# Altium PCB stm32.PcbDoc
Units mil, origin at the board's own origin, x right, y up, seen from the top; angles counter-clockwise.
Board outline 5275 x 3910 mil, 2 copper layers (Top Layer, Bottom Layer); 36 components, 59 nets, 279 pads, 15 vias.
Unrouted connection lines stored in the file: 6.
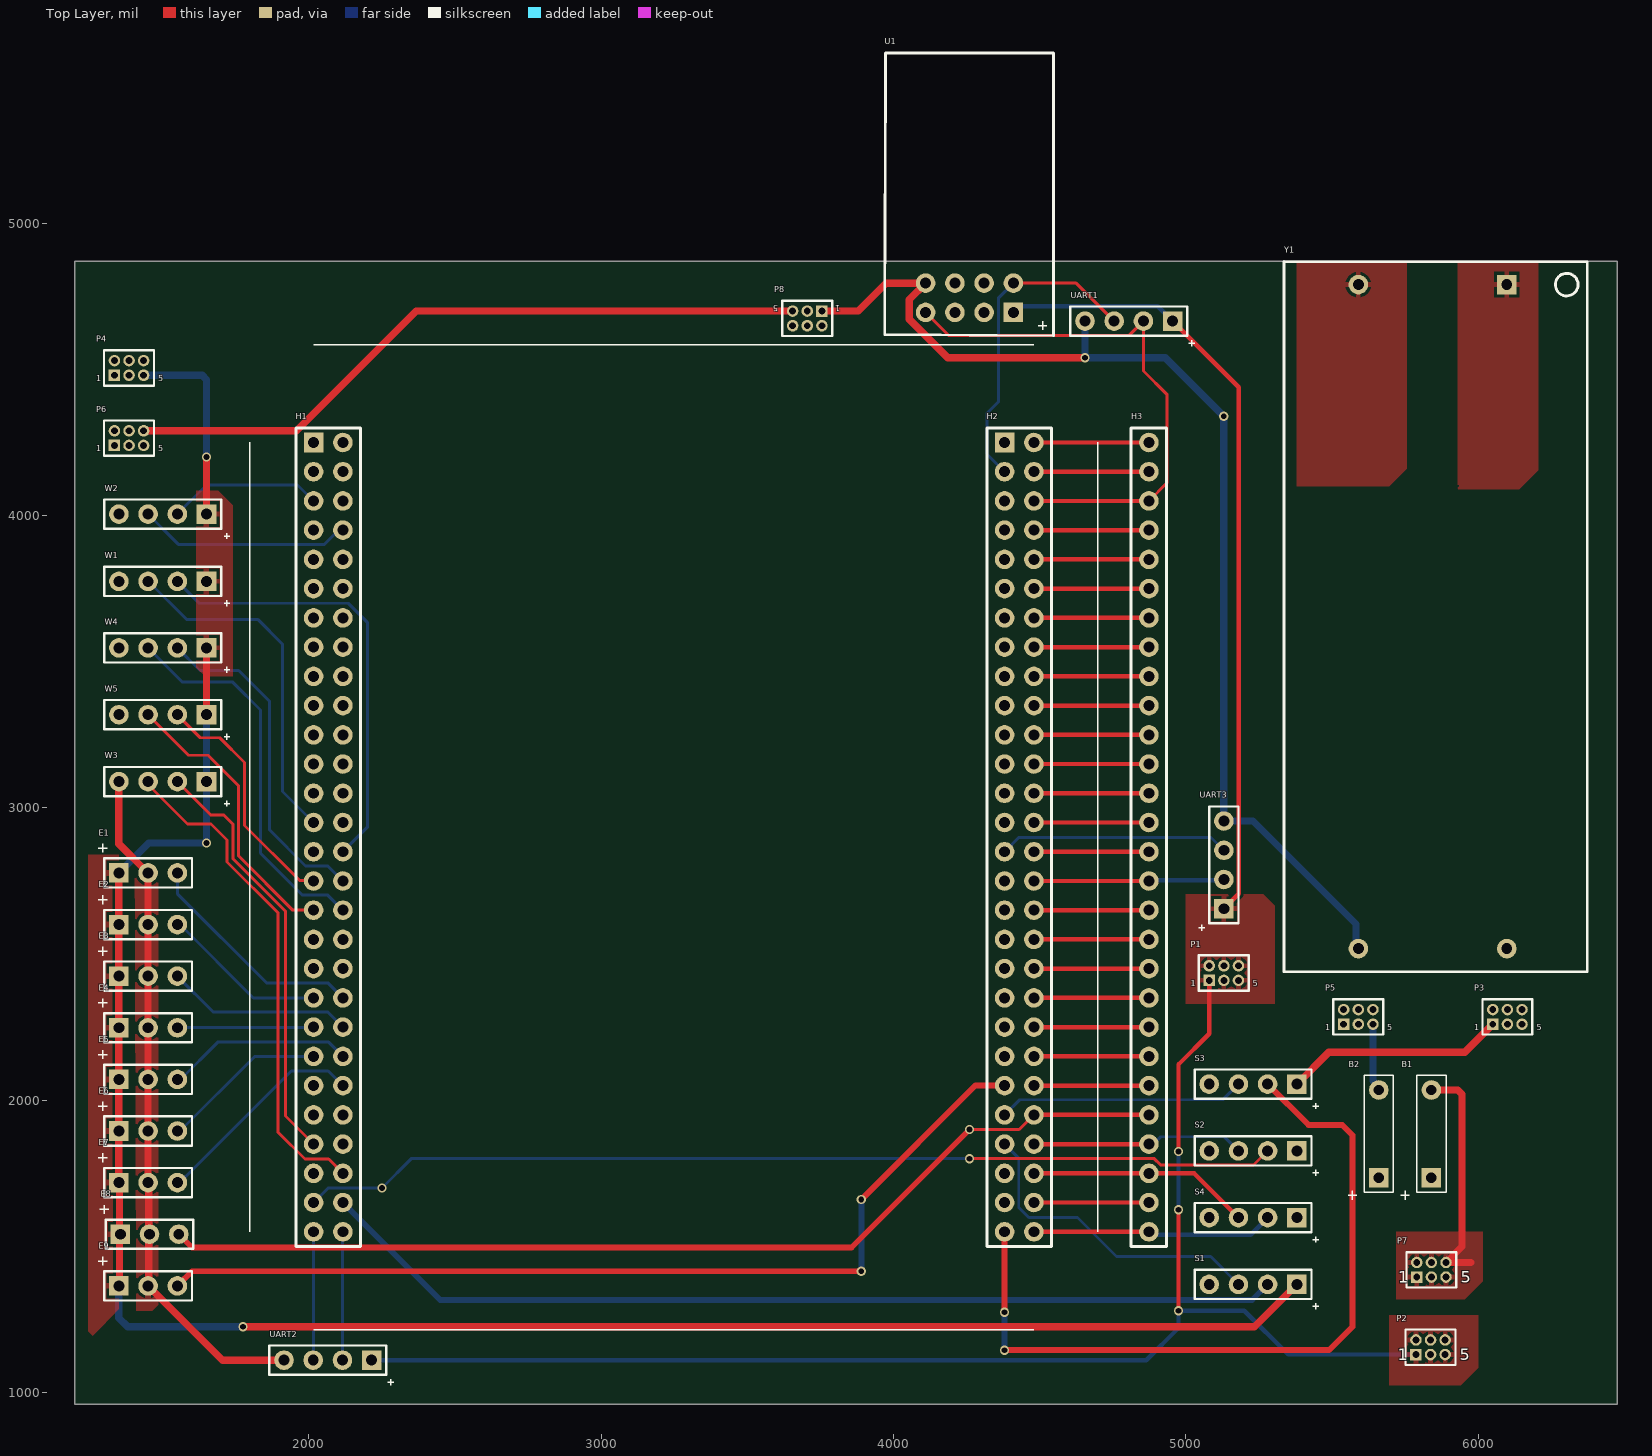
[diagram p0: Top Layer view]
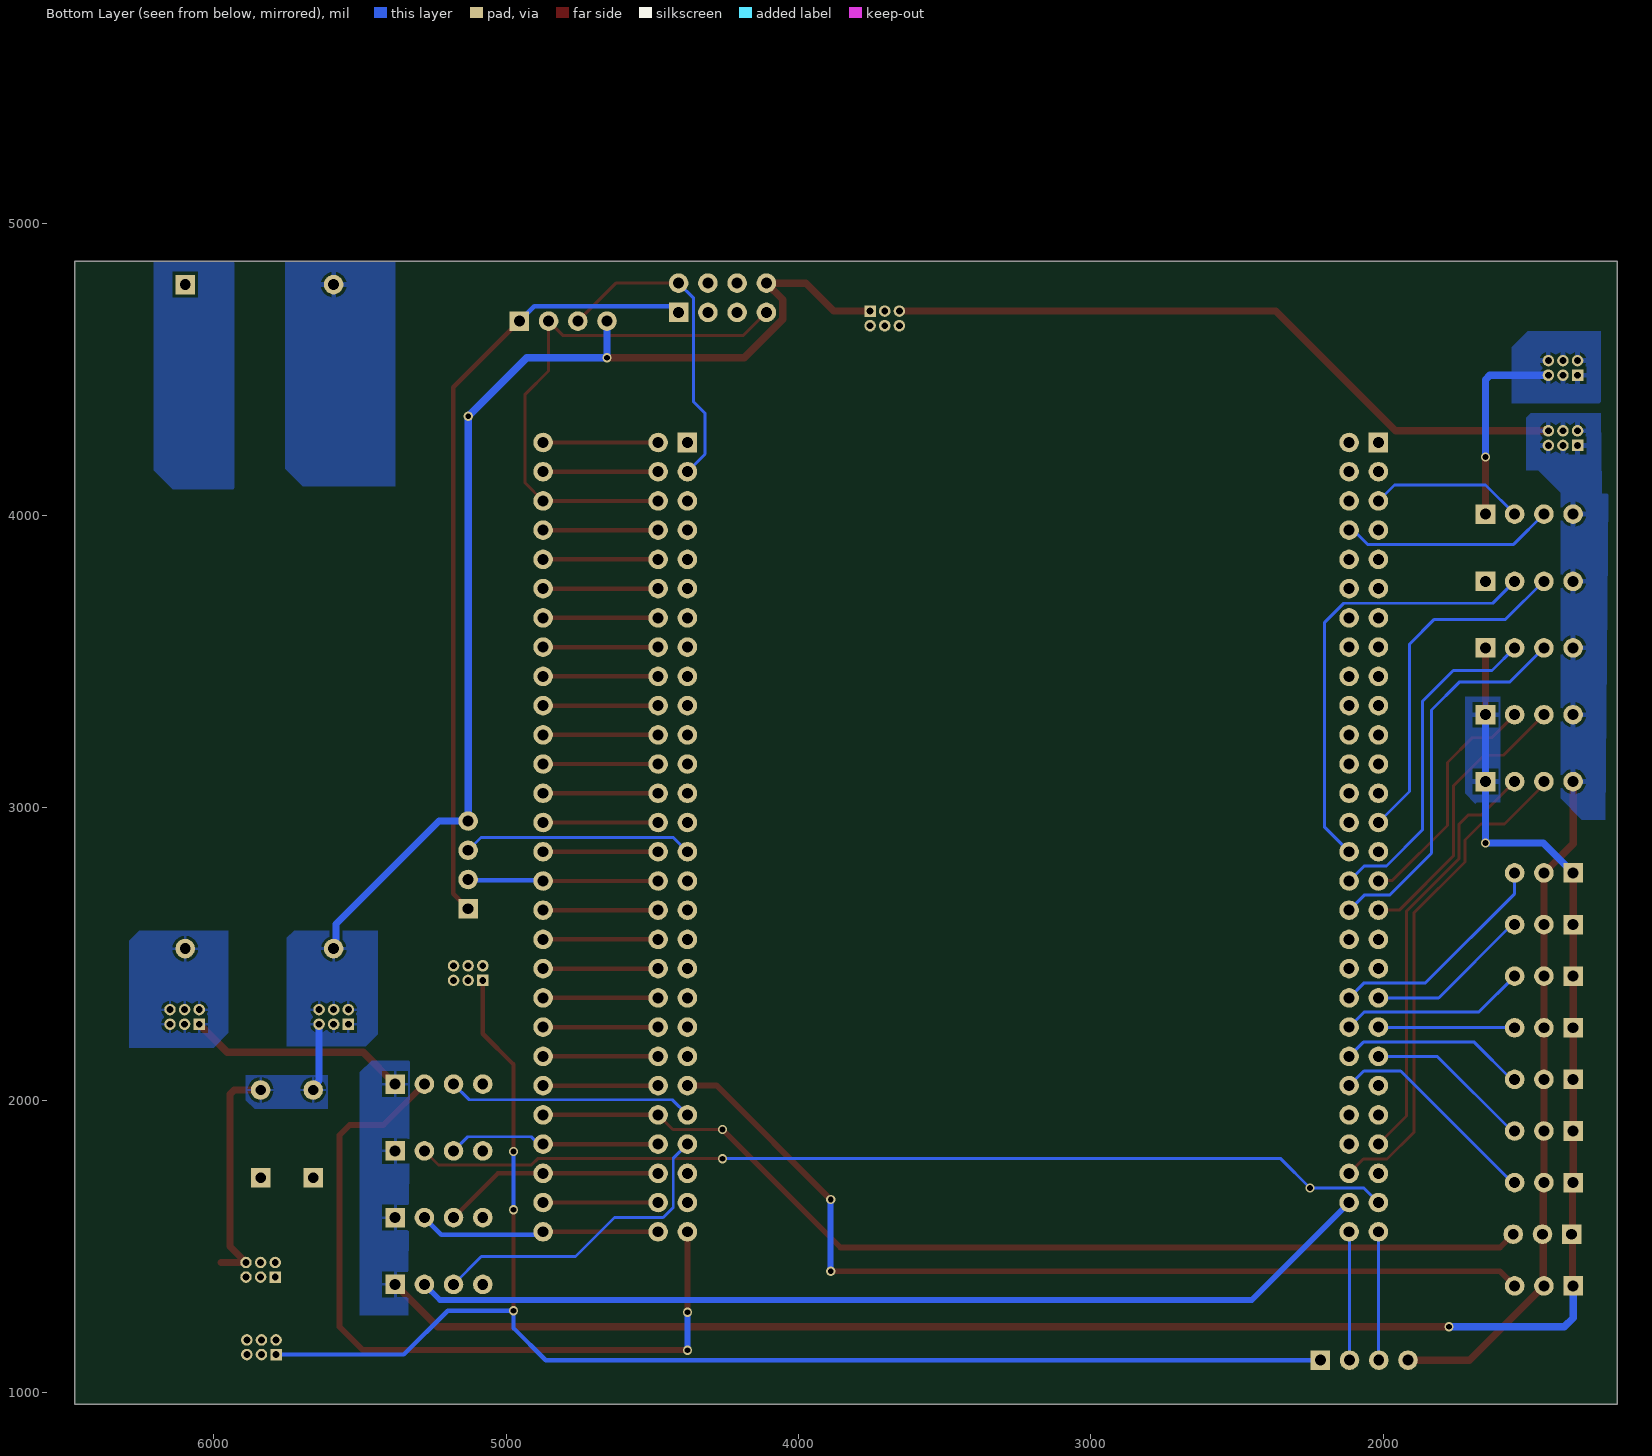
[diagram p1: Bottom Layer view, seen from below]

## Layer stack, top to bottom
Top Solder: solder mask 0.4, Solder Resist, Dk 3.5
Top Layer: signal copper 1.4
Dielectric 1: dielectric 12.6, FR-4, Dk 4.8
Bottom Layer: signal copper 1.4
Bottom Solder: solder mask 0.4, Solder Resist, Dk 3.5

## Board outline
1200,960 6475,960 6475,4870 1200,4870

## Design rules (kind name [scope] priority, off if disabled: settings)
Clearance [All] p1: gap=10 ignorepadtopadclearanceinfootprint=FALSE except(0: Arc-Hole Track-Hole SMDPad-Hole THPad-Hole Via-Hole Fill-Hole Poly-Hole Region-Hole Text-Hole)
PolygonConnect [All] p1: connectstyle=Relief reliefconductorwidth=18 reliefentries=4 polygonreliefangle="90 Angle" airgapwidth=10
RoutingVias [All] p1: holewidth=28 width=50 viastyle="Through Hole" minholewidth=28 minwidth=50 maxholewidth=28 maxwidth=50
SolderMaskExpansion [All] p1: expansion=4
Width POWER [InNetClass('POWER')] p1: maxlimit=60 minlimit=15 preferedwidth=25
Width [All] p2: maxlimit=30 minlimit=10 preferedwidth=15
30 further rules are at their usual default settings.

## Classes and differential pairs
net class POWER: 3.3V 5V GND

## Components (designator, comment, footprint, x,y, rotation, side; value= is the part's Value field where it differs from the comment)
B1 "BEEP" BEEP 5840,1735 r90 top
B2 "BEEP" BEEP 5660,1735 r90 top
E1 "E18-D80NK" E18 1350,2777.5 r0 top
E2 "E18-D80NK" E18 1350,2600.94 r0 top
E3 "E18-D80NK" E18 1350,2424.38 r0 top
E4 "E18-D80NK" E18 1350,2247.81 r0 top
E5 "E18-D80NK" E18 1350,2071.25 r0 top
E6 "E18-D80NK" E18 1350,1894.69 r0 top
E7 "E18-D80NK" E18 1350,1718.12 r0 top
E8 "E18-D80NK" E18 1355,1541.56 r0 top
E9 "E18-D80NK" E18 1350,1365 r0 top
H1 "STM32_L_正插" Header2*28 2016.22,4250 r0 top locked
H2 "STM32_R_正插" Header2*28 4380,4250 r0 top locked
H3 "STM32_R_R" HEADER1*28 4813.07,4300 r0 top
P1 "MHDR2X3" MHDR2X3 5080,2410 r0 top
P2 "MHDR2X3" MHDR2X3 5787.19,1130 r0 top
P3 "MHDR2X3" MHDR2X3 6050,2260 r0 top
P4 "MHDR2X3" MHDR2X3 1335,4480 r0 top
P5 "MHDR2X3" MHDR2X3 5540,2260 r0 top
P6 "MHDR2X3" MHDR2X3 1335,4240 r0 top
P7 "MHDR2X3" MHDR2X3 5790,1395 r0 top
P8 "MHDR2X3" MHDR2X3 3755,4699.46 r180 top
S1 "STEP" STEP 5380,1370 r180 top
S2 "STEP" STEP 5380,1826.67 r180 top
S3 "STEP" STEP 5380,2055 r180 top
S4 "STEP" STEP 5380,1598.33 r180 top
U1 "ESP8266" ESP8266 4110,4695 r90 top
UART1 "UART" UART 4955,4665 r180 top
UART2 "UART" UART 2215,1110.63 r180 top
UART3 "UART" UART 5130,2655 r90 top
W1 "WAVE" WAVE1*4 1650,3775 r180 top
W2 "WAVE" WAVE1*4 1650,4005 r180 top
W3 "WAVE" WAVE1*4 1650,3090 r180 top
W4 "WAVE" WAVE1*4 1650,3547.5 r180 top
W5 "WAVE" WAVE1*4 1650,3318.75 r180 top
Y1 "YS-07" YS-07 6097.87,4790 r270 top

## Footprints (in the part's own frame and the unit in brackets; to place one, negate y for a bottom-side part, rotate by r counter-clockwise, add the part's x,y. Pads: shape width x height; smd on the part's side, far side on the other; paste and mask are expansions set on the pad)
BEEP [mm]
  rect 1.7x1.7 hole 0.9: 1(0,0)
  round 1.7 hole 0.9: 2(7.62,0)
  silkscreen extent -1.91,-1.27 8.89,2.67
E18 [mm]
  rect 1.7x1.7 hole 0.95: 1(0,0)
  round 1.7 hole 0.95: 2(2.54,0) 3(5.08,0)
  silkscreen extent -1.78,-1.27 6.35,2.54
ESP8266 [mm]
  round 1.7 hole 0.95: 1(0,0) 2(0,-2.54) 3(0,-5.08) 5(2.54,-7.62) 6(2.54,-5.08) 7(2.54,-2.54) 8(2.54,0)
  rect 1.7x1.7 hole 0.95: 4(0,-7.62)
  silkscreen extent -2.03,-11.12 22.54,3.56
HEADER1*28 [mm]
  round 1.7 hole 0.95: 29(1.54,-69.85) 30(1.54,-67.31) 31(1.54,-64.77) 32(1.54,-62.23) 33(1.54,-59.69) 34(1.54,-57.15) 35(1.54,-54.61) 36(1.54,-52.07) 37(1.54,-49.53) 38(1.54,-46.99) 39(1.54,-44.45) 40(1.54,-41.91) 41(1.54,-39.37) 42(1.54,-36.83) 43(1.54,-34.29) 44(1.54,-31.75) 45(1.54,-29.21) 46(1.54,-26.67) 47(1.54,-24.13) 48(1.54,-21.59) 49(1.54,-19.05) 50(1.54,-16.51) 51(1.54,-13.97) 52(1.54,-11.43) 53(1.54,-8.89) 54(1.54,-6.35) 55(1.54,-3.81) 56(1.54,-1.27)
  silkscreen extent 0,-71.12 3.08,0
Header2*28 [mm]
  rect 1.7x1.7 hole 0.95: 1(0,0)
  round 1.7 hole 0.95: 2(0,-2.54) 3(0,-5.08) 4(0,-7.62) 5(0,-10.16) 6(0,-12.7) 7(0,-15.24) 8(0,-17.78) 9(0,-20.32) 10(0,-22.86) 11(0,-25.4) 12(0,-27.94) 13(0,-30.48) 14(0,-33.02) 15(0,-35.56) 16(0,-38.1) 17(0,-40.64) 18(0,-43.18) 19(0,-45.72) 20(0,-48.26) 21(0,-50.8) 22(0,-53.34) 23(0,-55.88) 24(0,-58.42) 25(0,-60.96) 26(0,-63.5) 27(0,-66.04) 28(0,-68.58) 29(2.54,-68.58) 30(2.54,-66.04) 31(2.54,-63.5) 32(2.54,-60.96) 33(2.54,-58.42) 34(2.54,-55.88) 35(2.54,-53.34) 36(2.54,-50.8) 37(2.54,-48.26) 38(2.54,-45.72) 39(2.54,-43.18) 40(2.54,-40.64) 41(2.54,-38.1) 42(2.54,-35.56) 43(2.54,-33.02) 44(2.54,-30.48) 45(2.54,-27.94) 46(2.54,-25.4) 47(2.54,-22.86) 48(2.54,-20.32) 49(2.54,-17.78) 50(2.54,-15.24) 51(2.54,-12.7) 52(2.54,-10.16) 53(2.54,-7.62) 54(2.54,-5.08) 55(2.54,-2.54) 56(2.54,0)
  silkscreen extent -1.54,-69.85 4.08,1.27
MHDR2X3 [mm] "Connector; Header; 3x2 Position"
  rect 1x1 hole 0.6: 1(0,0)
  round 1 hole 0.6: 2(0,1.27) 3(1.27,0) 4(1.27,1.27) 5(2.54,0) 6(2.54,1.27)
  silkscreen extent -0.9,-0.9 3.44,2.17
STEP [mm]
  rect 1.7x1.7 hole 0.95: 1(0,0)
  round 1.7 hole 0.95: 2(2.54,0) 3(5.08,0) 4(7.62,0)
  silkscreen extent -1.91,-1.27 8.89,2.16
UART [mm]
  rect 1.7x1.7 hole 0.95: 1(0,0)
  round 1.7 hole 0.95: 2(2.54,0) 3(5.08,0) 4(7.62,0)
  silkscreen extent -1.91,-1.27 8.89,2.16
WAVE1*4 [mm]
  rect 1.7x1.7 hole 0.95: 1(0,0)
  round 1.7 hole 0.95: 2(2.54,0) 3(5.08,0) 4(7.62,0)
  silkscreen extent -2.03,-1.27 8.89,2.16
YS-07 [mm]
  rect 1.7x1.7 hole 0.95: 1(0,0)
  round 1.7 hole 0.95: 2(0,-12.9) 3(57.7,-12.9) 4(57.7,0)
  silkscreen extent -2,-19.35 59.7,7

## Part data
P1 P2 P3 P4 P5 P6 P7 P8: "Header, 3-Pin, Dual row", LatestRevisionDate=17-Jul-2002, LatestRevisionNote="Re-released for DXP Platform.", Publisher="Altium Limited"

## Via types
v1: diameter 31.5, hole 19.68, Top Layer to Bottom Layer, 15 vias

## Nets (pads, with @x,y where several pads share a name; then routed paths per layer and width w, separated by ;. In a path a pad name is that pad's centre, name@x,y a point inside that pad or via, vN(x,y) a via of type N, cw(c..) or ccw(c..) an arc to the next point about the centre after c; other vN are vias at no path point)
3.3V: P1.1 P1.2 P1.3 P1.4 P1.5 P1.6 P2.1 P2.2 P2.3 P2.4 P2.5 P2.6 U1.4 UART1.1 UART2.1 UART3.1 | length 7612.3
  Top Layer w15: UART1.1 5180.96,4439.04 5180.96,2705.96 UART3.1 ; v1(4975,1280) v1(4975,1625) ; v1(4975,1825) 4975,2122.5 5080,2227.5 P1.1
  Bottom Layer w15: UART2.1 4865,1110.63 4975,1220.63 v1(4975,1280) 5200,1280 5350,1130 P2.1 ; U1.4 4430.96,4715.96 4904.04,4715.96 UART1.1 ; v1(4975,1625) v1(4975,1825)
5V: E1.1 E2.1 E3.1 E4.1 E5.1 E6.1 E7.1 E8.1 E9.1 P3.1 P3.2 P3.3 P3.4 P3.5 P3.6 P4.1 P4.2 P4.3 P4.4 P4.5 P4.6 S1.1 S2.1 S3.1 S4.1 W1.1 W2.1 W3.1 W4.1 W5.1 Y1.4 | length 8075.2
  Top Layer w25: E9.1 1352.5,1367.5 1352.5,1539.06 E8.1 1352.5,1544.06 1352.5,1715.62 E7.1 E6.1 E5.1 E4.1 E3.1 E2.1 E1.1 ; W5.1 W4.1 ; W2.1 v1(1650,4200) ; v1(1775,1225) 5235,1225 S1.1 ; S3.1 5489.39,2164.39 5954.39,2164.39 P3.1
  Bottom Layer w25: E9.1 1350,1255 1380,1225 v1(1775,1225) ; E1.1 1452.5,2880 v1(1650,2880) W3.1 W5.1 ; P4.5 1635,4480 1650,4465 v1(1650,4200)
GND: B1.2 B2.2 E1.2 E2.2 E3.2 E4.2 E5.2 E6.2 E7.2 E8.2 E9.2 P5.1 P5.2 P5.3 P5.4 P5.5 P5.6 P6.1 P6.2 P6.3 P6.4 P6.5 P6.6 P7.1 P7.2 P7.3 P7.4 P7.5 P7.6 P8.1 P8.2 P8.3 P8.4 P8.5 P8.6 U1.8 UART1.4 UART2.4 UART3.4 W1.4 W2.4 W3.4 W4.4 W5.4 Y1.3 | length 9693.6
  Top Layer w25: W3.4 1350,2877.5 E1.2 E2.2 E3.2 E4.2 E5.2 E6.2 E7.2 ; P6.6 1957.47,4290 2366.93,4699.46 P8.5 ; E9.2 1704.37,1110.63 UART2.4 ; E9.2@1452.5,1367.5 E8.2@1452.5,1539.06 ; E8.2@1452.5,1544.06 E7.2@1452.5,1715.62 ; P8.1 3879.06,4699.46 3974.6,4795 U1.8 4054.04,4739.04 4054.04,4671.82 4185.85,4540 v1(4655,4540) ; B1.2 5930.05,2035 5944.69,2020.36 5944.69,1499.69 P7.6 5975,1445
  Bottom Layer w25: UART1.4 v1(4655,4540) 4930,4540 v1(5130,4340) UART3.4 5230,2955 5581.98,2603.02 5581.98,2526.37 Y1.3 ; P5.5 5640,2066.35 5660,2046.35 B2.2
IN+: Y1.1
IN-: Y1.2
PA0: H1.30 S1.2 | length 3324.1
  Bottom Layer w20: H1.30 2449.69,1316.54 5226.54,1316.54 S1.2
PA1: H1.27 S2.2 | length 3355
  Top Layer w10: v1(4260,1800) 4892.24,1800 4914.04,1778.2 5231.54,1778.2 S2.2
  Bottom Layer w10: H1.27 2066.22,1700 v1(2250,1700) 2350,1800 v1(4260,1800)
PA2: H1.29 UART2.2 | length 441.6
  Top Layer w10: UART2.2 UART2.2@2115.61,1111.24 ; H1.29@2115.61,1549.39 H1.29
  Bottom Layer w10: UART2.2 2115.61,1111.24 2115.61,1549.39 H1.29
PA3: H1.28 UART2.3 | length 441.6
  Top Layer w10: UART2.3 UART2.3@2015.61,1111.24 ; H1.28@2015.61,1549.39 H1.28
  Bottom Layer w10: UART2.3 2015.61,1111.24 2015.61,1549.39 H1.28
PA4: H2.28 S3.2 | length 2645.6
  Top Layer w20: v1(4380,1145) 5490,1145 5570,1225 5570,1880 5535,1915 5420,1915 S3.2 ; v1(4380,1275) H2.28
  Bottom Layer w20: v1(4380,1145) v1(4380,1275)
PA5: H2.29 H3.29 S4.2 | length 828.3
  Top Layer w15: H2.29 H3.29
  Bottom Layer w15: H3.29 4883.7,1540 5221.67,1540 S4.2
PA7: H2.30 H3.30 | length 393.7
  Top Layer w15: H2.30 H3.30
PA9: H2.54 H3.54 U1.1 UART1.2 | length 1864.8
  Top Layer w10: U1.1 4188.46,4616.54 4806.54,4616.54 UART1.2 4855,4495 4935,4415 4935,4111.3 H3.54
  Top Layer w15: H2.54 H3.54
PA10: H2.2 U1.5 UART1.3 | length 1106
  Top Layer w10: U1.5 4625,4795 UART1.3
  Bottom Layer w10: H2.2 4320,4210 4320,4350 4358.46,4388.46 4358.46,4743.46 U1.5
PA11: H2.55 H3.55 | length 393.7
  Top Layer w15: H2.55 H3.55
PA13: H2.56 H3.56 | length 393.7
  Top Layer w15: H2.56 H3.56
PB0: H2.25 S1.3 | length 1097.6
  Bottom Layer w10: H2.25 4428.46,1801.54 4428.46,1633 4463,1598.46 4629.77,1598.46 4763.23,1465 5085,1465 S1.3
PB1: H2.32 H3.32 S2.3 | length 730.5
  Top Layer w15: H2.32 H3.32
  Bottom Layer w10: H3.32 4889.11,1850 4914.24,1875.13 5131.54,1875.13 S2.3
PB2: H2.24 S3.3 | length 843.5
  Bottom Layer w10: H2.24 4431.54,2001.54 5126.54,2001.54 S3.3
PB10: H2.41 H3.41 UART3.2 | length 652.1
  Top Layer w15: H2.41 H3.41
  Bottom Layer w15: H3.41 4876.2,2752.5 5127.5,2752.5 UART3.2
PB11: H2.15 UART3.3 | length 788.1
  Bottom Layer w10: H2.15 4428.46,2898.46 5086.54,2898.46 UART3.3
PB12: H2.42 H3.42 | length 393.7
  Top Layer w15: H2.42 H3.42
PB14: H2.43 H3.43 | length 393.7
  Top Layer w15: H2.43 H3.43
PC1: H1.25 W3.2 | length 1465.3
  Top Layer w10: W3.2 1550,3080 1560,3080 1665,2975 1710,2975 1740,2945 1740,2826.72 1920,2646.72 1920,1946.22 H1.25
PC2: H1.31 W3.3 | length 1710.4
  Top Layer w10: W3.3 1450,3080 1585,2945 1665,2945 1720,2890 1720,2815 1895,2640 1895,1890 1986.54,1798.46 2067.76,1798.46 H1.31
PC5: H2.31 H3.31 S4.3 | length 762.8
  Top Layer w15: H2.31 H3.31 5028.33,1750 S4.3
PC7: H2.52 H3.52 | length 393.7
  Top Layer w15: H2.52 H3.52
PC9: H2.53 H3.53 | length 393.7
  Top Layer w15: H2.53 H3.53
PD0: H1.3 W2.2 | length 530.4
  Bottom Layer w10: W2.2 1650,4105 1961.22,4105 H1.3
PD1: H1.53 W2.3 | length 729.2
  Bottom Layer w10: W2.3 1553.46,3901.54 2053.46,3901.54 2101.93,3950 H1.53
PD8: H2.44 H3.44 | length 393.7
  Top Layer w15: H2.44 H3.44
PD10: H2.45 H3.45 | length 393.7
  Top Layer w15: H2.45 H3.45
PD12: H2.46 H3.46 | length 393.7
  Top Layer w15: H2.46 H3.46
PD14: H2.47 H3.47 | length 393.7
  Top Layer w15: H2.47 H3.47
PE0: H1.14 W1.3 | length 1203.6
  Bottom Layer w10: W1.3@1450,3776.25 1581.25,3645 1825,3645 1910,3560 1910,3056.22 H1.14
PE1: H1.42 W1.2 | length 1528.8
  Bottom Layer w10: W1.2@1550,3776.25 W1.2 1625,3700 2134.76,3700 2200,3634.76 2200,2933.78 H1.42
PE3: H1.41 W4.2 | length 1154.3
  Bottom Layer w10: W4.2 1627.5,3470 1760,3470 1865,3365 1865,2925 1988.46,2801.54 2064.69,2801.54 H1.41
PE4: H1.16 W5.2 | length 826.5
  Top Layer w10: W5.2 1628.75,3240 ; 1630,3240 1695,3240 1780,3155 1780,2940 1967.76,2752.24 2013.98,2752.24 H1.16
PE5: H1.40 W4.3 | length 1325
  Bottom Layer w10: W4.3 1567.5,3430 1740,3430 1835,3335 1835,2845 1978.46,2701.54 2064.69,2701.54 H1.40
PE6: H1.17 W5.3 | length 982.6
  Top Layer w10: W5.3 1588.75,3180 ; 1590,3180 1655,3180 1760,3075 1760,2835 1945,2650 H1.17
PE8: H2.37 H3.37 | length 393.7
  Top Layer w15: H2.37 H3.37
PE12: H2.38 H2.39 H3.38 H3.39 | length 787.4
  Top Layer w15: H2.38 H3.38 ; H2.39 H3.39
PE14: H2.40 H3.40 | length 393.7
  Top Layer w15: H2.40 H3.40
PF1: E1.3 H1.37 | length 784.9
  Bottom Layer w10: E1.3 1550,2706.54 1855,2401.54 2064.69,2401.54 H1.37
PF2: E2.3 H1.20 | length 570.2
  Bottom Layer w10: E2.3 1559.06,2600.94 1810,2350 H1.20
PF3: E3.3 H1.36 | length 638.4
  Bottom Layer w10: E3.3 1672.84,2301.54 2064.69,2301.54 H1.36
PF4: E4.3 H1.21 | length 467.1
  Bottom Layer w10: E4.3 1551.09,2248.91 2015.13,2248.91 H1.21
PF5: E5.3 H1.35 | length 639
  Bottom Layer w10: E5.3 1561.25,2071.25 1688.46,2198.46 2067.76,2198.46 H1.35
PF6: E6.3 H1.22 | length 572
  Bottom Layer w10: E6.3 1559.69,1894.69 1815,2150 H1.22
PF7: E7.3 H1.34 | length 745.1
  Bottom Layer w10: E7.3 1558.12,1718.12 1940,2100 2066.22,2100 H1.34
PF11: E8.3 H2.33 H3.33 | length 3525.2
  Top Layer w10: v1(4260,1900) 4430,1900 H2.33
  Top Layer w15: H2.33 H3.33
  Top Layer w20: E8.3 1600.03,1496.54 3856.54,1496.54 v1(4260,1900)
PF12: E9.3 H2.23 | length 3257.3
  Top Layer w20: E9.3 1600,1415 v1(3890,1415) ; v1(3890,1660) 4280,2050 H2.23
  Bottom Layer w20: v1(3890,1415) v1(3890,1660)
PF13: H2.34 H3.34 | length 393.7
  Top Layer w15: H2.34 H3.34
PF15: H2.35 H3.35 | length 393.7
  Top Layer w15: H2.35 H3.35
PG1: H2.36 H3.36 | length 393.7
  Top Layer w15: H2.36 H3.36
PG2: H2.48 H3.48 | length 393.7
  Top Layer w15: H2.48 H3.48
PG4: H2.49 H3.49 | length 393.7
  Top Layer w15: H2.49 H3.49
PG6: H2.50 H3.50 | length 393.7
  Top Layer w15: H2.50 H3.50
PG8: H2.51 H3.51 | length 393.7
  Top Layer w15: H2.51 H3.51
pads on no net: B1.1 B2.1 H1.1 H1.2 H1.4 H1.5 H1.6 H1.7 H1.8 H1.9 H1.10 H1.11 H1.12 H1.13 H1.15 H1.18 H1.19 H1.23 H1.24 H1.26 H1.32 H1.33 H1.38 H1.39 H1.43 H1.44 H1.45 H1.46 H1.47 H1.48 H1.49 H1.50 H1.51 H1.52 H1.54 H1.55 H1.56 H2.1 H2.3 H2.4 H2.5 H2.6 H2.7 H2.8 H2.9 H2.10 H2.11 H2.12 H2.13 H2.14 H2.16 H2.17 H2.18 H2.19 H2.20 H2.21 H2.22 H2.26 H2.27 S1.4 S2.4 S3.4 S4.4 U1.2 U1.3 U1.6 U1.7

## Polygon pours and split planes (outlines as drawn)
IN- on Bottom Layer (solid, pour order 40): 5929.62,4865 5934.62,4870 6205,4870 6205,4155 6140,4090 5934.24,4090 5929.62,4094.62
IN- on Bottom Layer "3.3V" (solid, pour order 34): 5380,4870 5755,4870 5755,4160 5695,4100 5380,4100
5V on Bottom Layer (solid, pour order 26): 1255,4630 1505,4630 1560,4575 1560,4385 1260,4385 1255,4390
5V on Bottom Layer (solid, pour order 24): 1600,3380 1720,3380 1720,3050 1685,3015 1680,3020 1600,3020
GND on Bottom Layer (solid, pour order 18): 1230,4075 1392.35,4075 1392.35,3032.35 1320,2960 1240,2960
5V on Bottom Layer (solid, pour order 16): 5330,2135 5460,2135 5500,2095 5500,1265 5335,1265
GND on Bottom Layer (solid, pour order 12): 5610,2085 5890,2085 5890,2000 5860,1970 5610,1970
5V on Bottom Layer (solid, pour order 10): 5950,2580 6255,2580 6290,2545 6290,2180 6001.08,2180 5950,2231.08
GND on Bottom Layer (solid, pour order 6): 5440,2580 5725,2580 5750,2555 5750,2185 5480,2185 5440,2225
GND on Bottom Layer (solid, pour order 2): 1255,4350 1495,4350 1510,4335 1510,4155 1470,4155 1392.35,4077.35 1392.35,3885 1320,3885 1250,3955
GND on Top Layer "3.3V" (solid, pour order 46): 1405,2777.5 1485,2777.5 1485,1300 1465,1280 1410,1280
3.3V on Top Layer "3.3V" (solid, pour order 44): 5695,1265 6000,1265 6000,1085 5940,1025 5695,1025
GND on Top Layer "3.3V" (solid, pour order 42): 5720,1550 6015,1550 6015,1380.61 5954.39,1320 5720,1320
IN+ on Top Layer "3.3V" (solid, pour order 38): 5930,4870 6205,4870 6205,4155 6140,4090 5925,4090 5935,4100 5935,4105 5930,4105
IN- on Top Layer "3.3V" (solid, pour order 36): 5380,4870 5755,4870 5755,4160 5695,4100 5380,4100
3.3V on Top Layer "3.3V" (solid, pour order 32): 5000,2705 5265,2705 5305,2665 5305,2330 5000,2330
5V on Top Layer (solid, pour order 28): 1245,2840 1350,2840 1350,1285 1260,1195 1245,1210
5V on Top Layer (solid, pour order 22): 1615,4085 1690,4085 1740,4035 1740,3450 1645,3450 1615,3480

## Silkscreen, mask and mechanical layers (free items; w line width, h text height)
Top Overlay:
  lines w5: 1797.32,1550 1797.32,4250 ; 2016.22,1215.35 4480,1215.35 ; 2016.22,4584.65 4480,4584.65 ; 4698.9,1550 4698.9,4250
Mechanical 1:
  the board outline again, w5

## Text inside footprints (layer, text, board x,y; h text height)
P1: Top Overlay "5" at 5229.61,2390 h20; Top Overlay "1" at 5017.01,2390 h20
P2: Top Overlay "5" at 5936.8,1110 h39.37; Top Overlay "1" at 5724.2,1110 h39.37
P3: Top Overlay "5" at 6199.61,2240 h20; Top Overlay "1" at 5987.01,2240 h20
P4: Top Overlay "5" at 1484.61,4460 h20; Top Overlay "1" at 1272.01,4460 h20
P5: Top Overlay "5" at 5689.61,2240 h20; Top Overlay "1" at 5477.01,2240 h20
P6: Top Overlay "5" at 1484.61,4220 h20; Top Overlay "1" at 1272.01,4220 h20
P7: Top Overlay "5" at 5939.61,1375 h39.37; Top Overlay "1" at 5727.01,1375 h39.37
P8: Top Overlay "5" at 3605.39,4719.46 h20 r180; Top Overlay "1" at 3817.99,4719.46 h20 r180